# Altium PCB PCB.PcbDoc
Units mm, origin at the board's own origin, x right, y up, seen from the top; angles counter-clockwise.
Board outline 85.38 x 90.25 mm, 2 copper layers (Top Layer, Bottom Layer); 34 components, 16 nets, 78 pads, 6 vias.
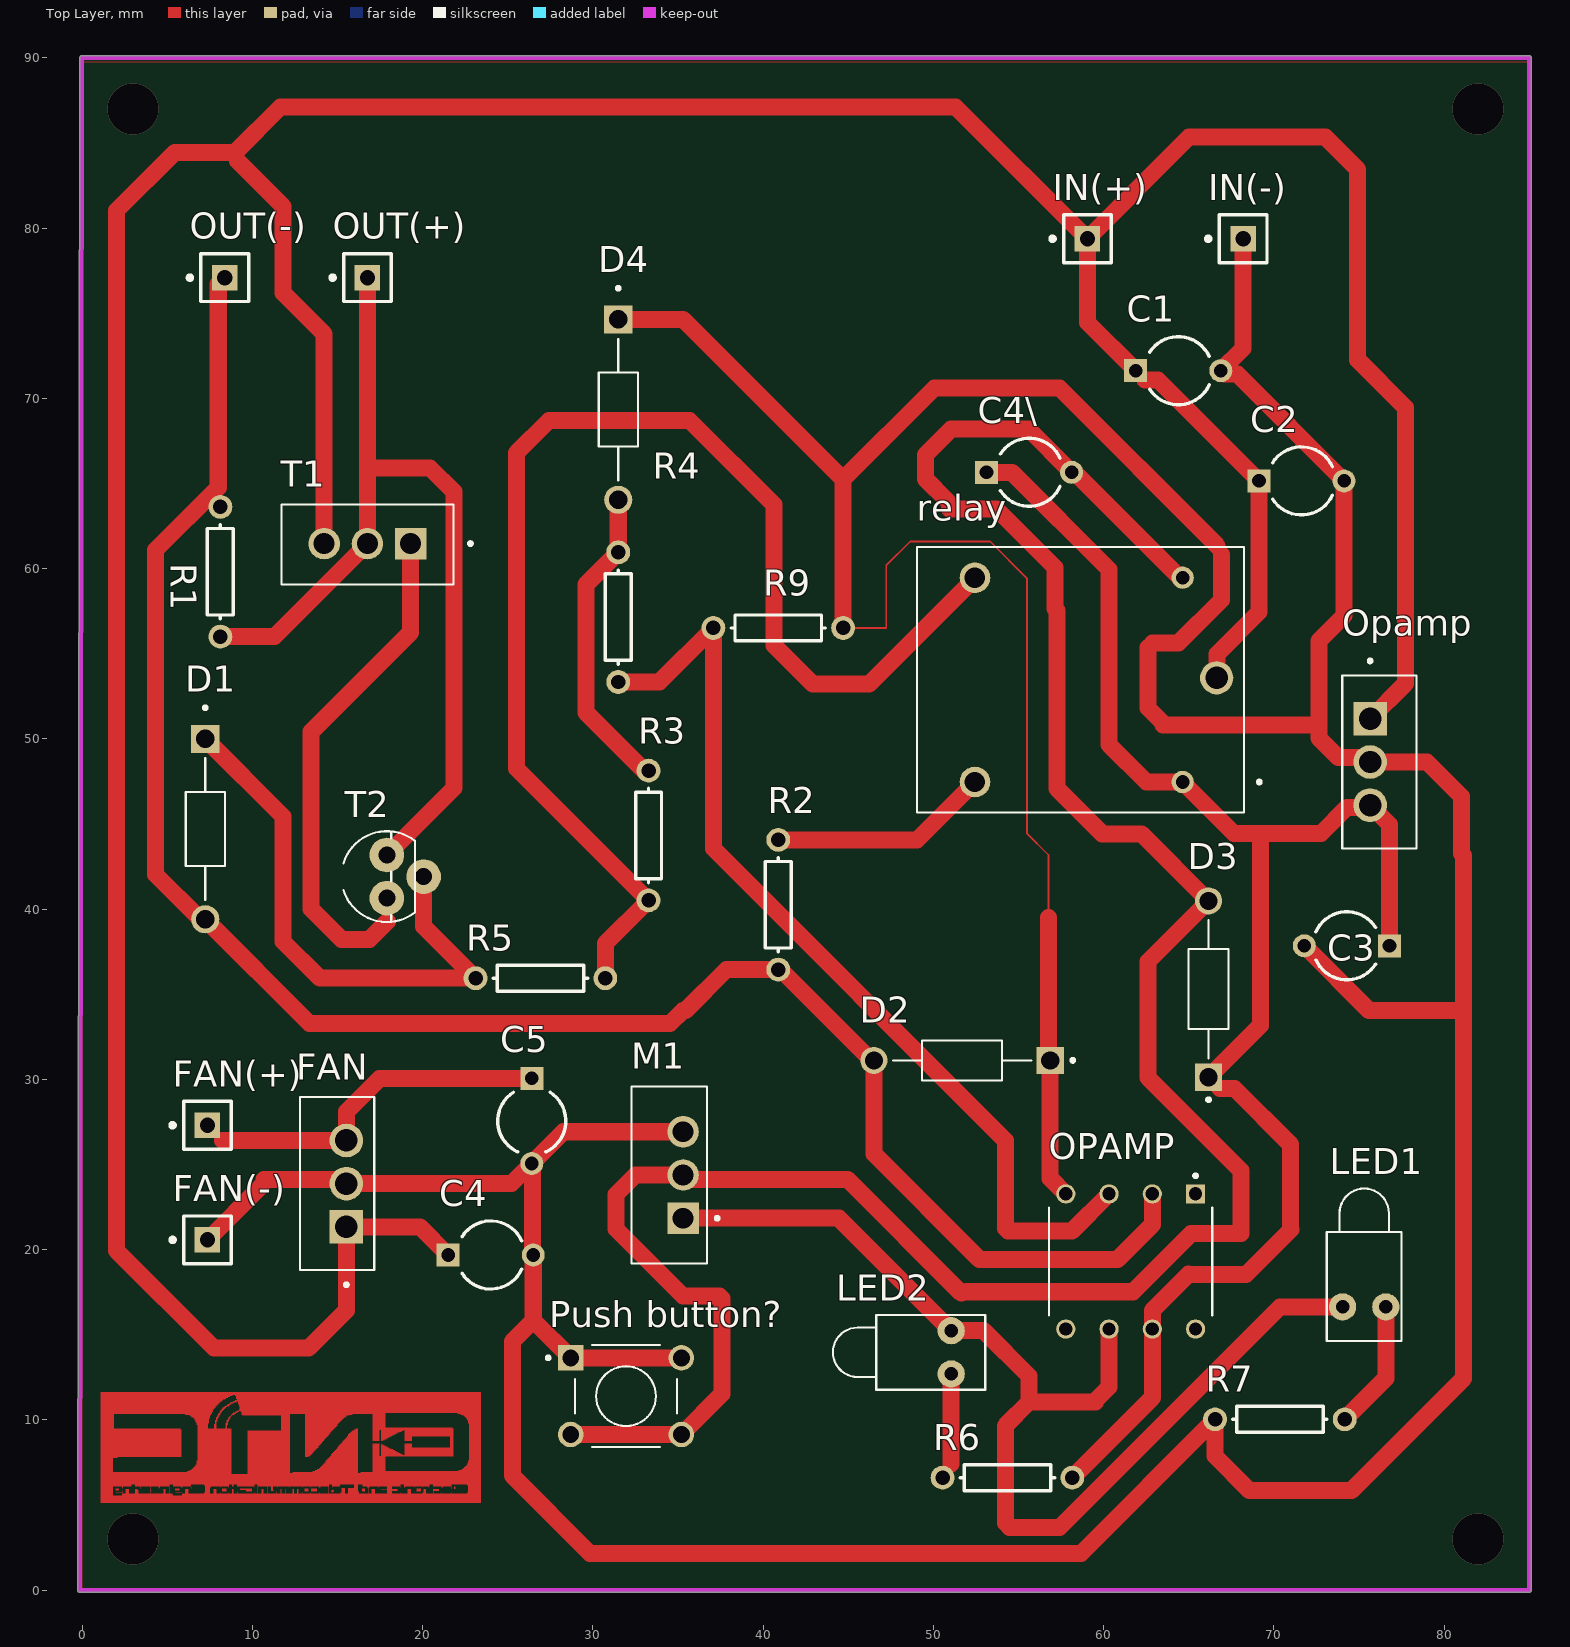
[diagram p0: Top Layer view]
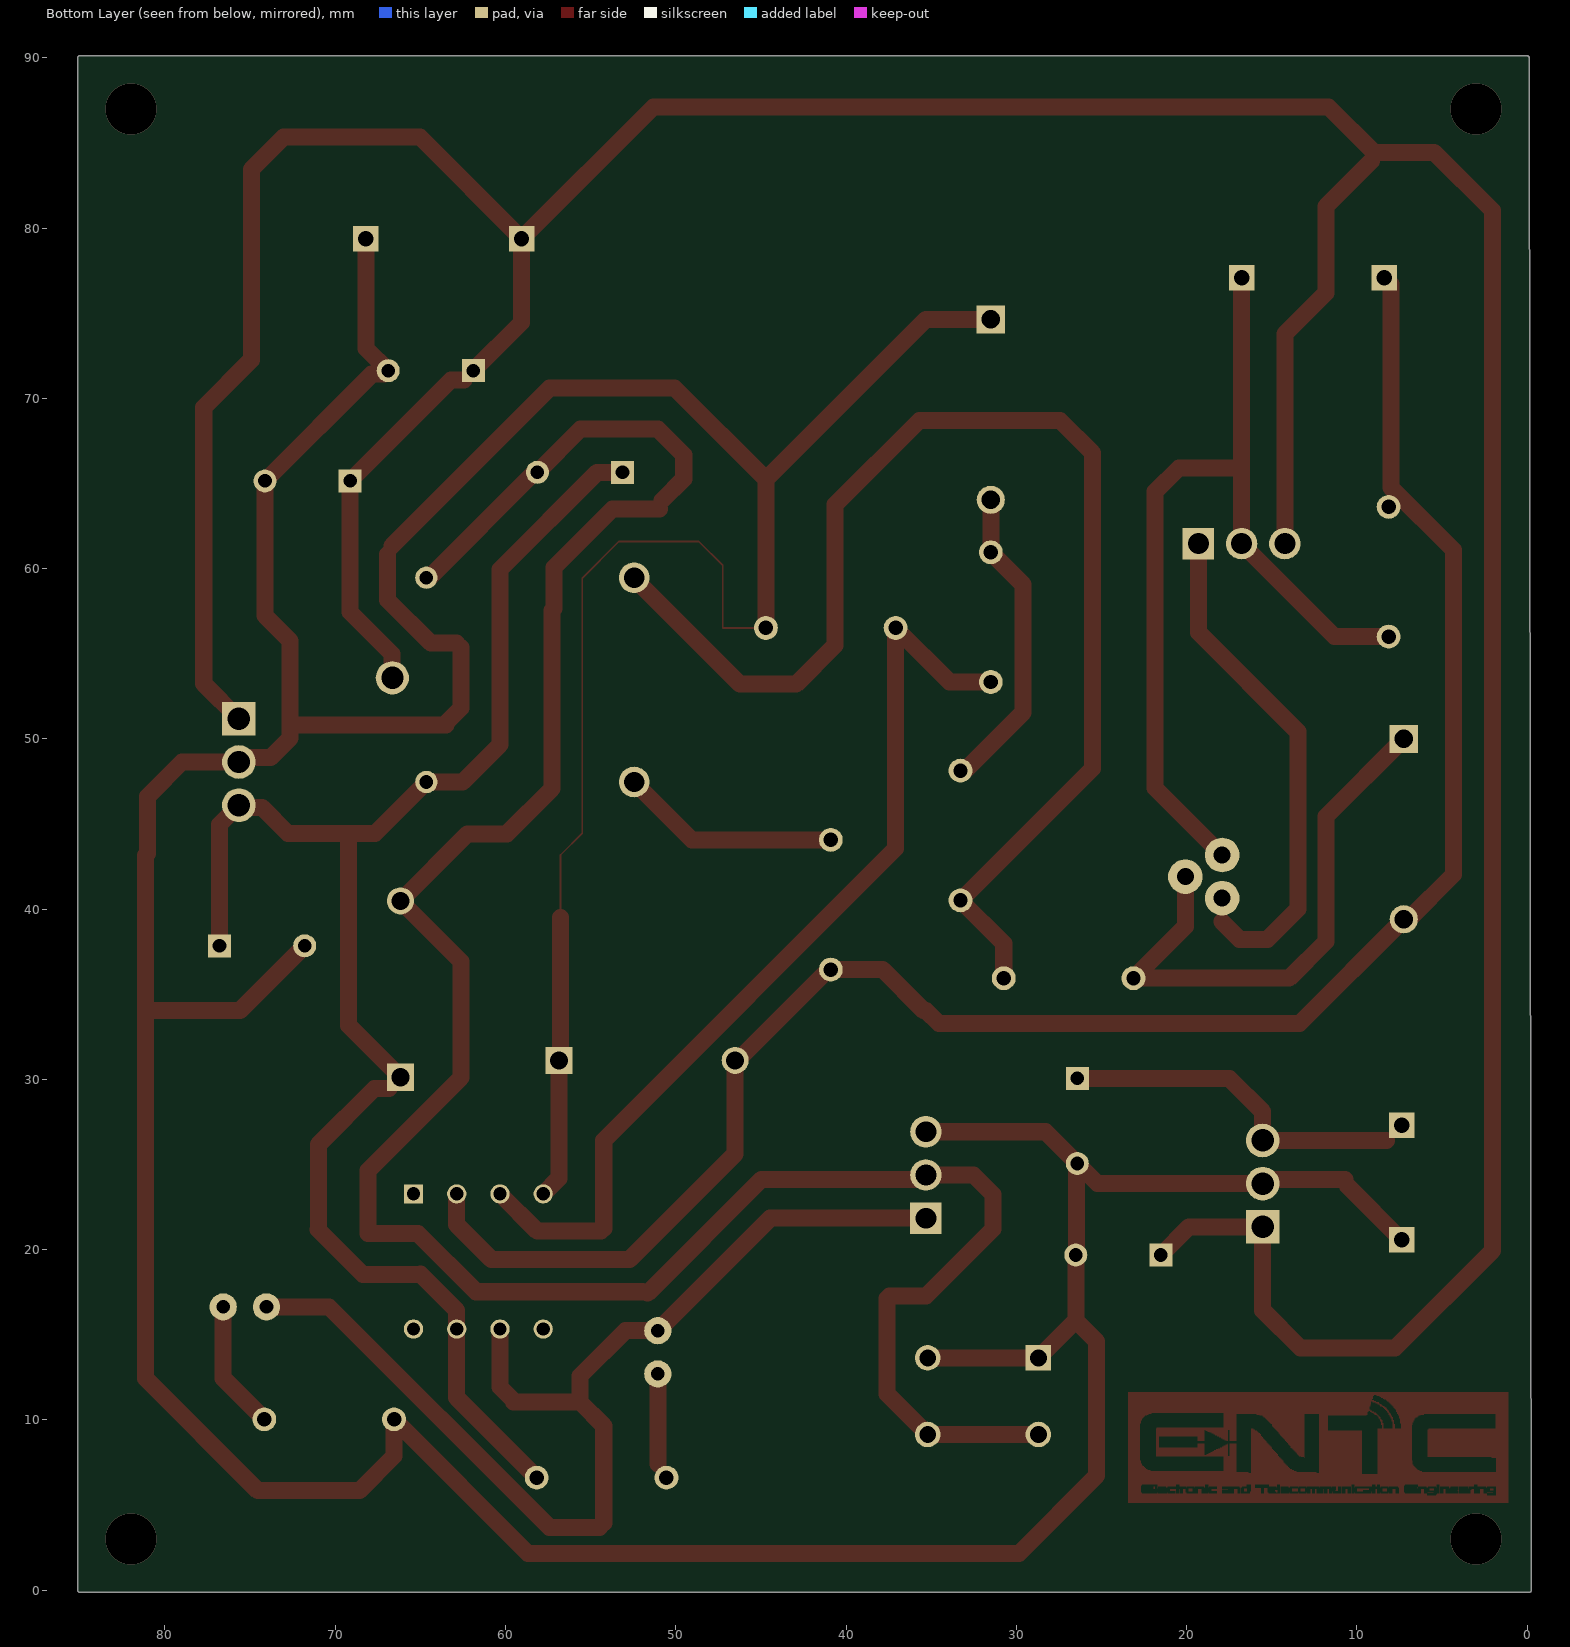
[diagram p1: Bottom Layer view, seen from below]

## Layer stack, top to bottom
Top Solder: solder mask 0.0102, Solder Resist, Dk 3.5
Top Layer: signal copper 0.0356
Dielectric 1: dielectric 0.32, FR-4, Dk 4.8
Bottom Layer: signal copper 0.0356
Bottom Solder: solder mask 0.0102, Solder Resist, Dk 3.5

## Board outline
-0.254,0 ccw(c-0.127,0) -0.064,-0.11 ccw(c0,0) 0,-0.127 85,-0.127 ccw(c85,0) 85.127,0 85.127,90 ccw(c85,90) 85,90.127 0,90.127 ccw(c0,90) -0.127,90

## Design rules (kind name [scope] priority, off if disabled: settings)
Clearance [All] p1: gap=0.254 ignorepadtopadclearanceinfootprint=FALSE except(0: Arc-Hole Track-Hole SMDPad-Hole THPad-Hole Via-Hole Fill-Hole Poly-Hole Region-Hole Text-Hole)
DiffPairsRouting [All] p1: maxlimit=0.254 minlimit=0.254 mostfreqgap=0.254 toplayer_minwidth=1 toplayer_maxwidth=2 toplayer_prefwidth=1 bottomlayer_minwidth=1 bottomlayer_maxwidth=2 bottomlayer_prefwidth=1 maxuncoupledlength=12.7
PolygonConnect [All] p1: connectstyle=Relief reliefconductorwidth=0.254 reliefentries=4 polygonreliefangle="90 Angle" airgapwidth=0.254
RoutingVias [All] p1: holewidth=0.711 width=1.27 viastyle="Through Hole" minholewidth=0.711 minwidth=1.27 maxholewidth=0.711 maxwidth=1.27
SolderMaskExpansion [All] p1: expansion=0.102 istentingtop=FALSE
Width [All] p1: maxlimit=0.254 minlimit=0.254 preferedwidth=0.254
29 further rules are at their usual default settings.

## Components (designator, comment, footprint, x,y, rotation, side; value= is the part's Value field where it differs from the comment)
C1 "Cap2" CAPR5-4X5 64.389,71.628 r0 top value=100pF
C2 "Cap2" CAPR5-4X5 71.628,65.151 r0 top value=100pF
C3 "Cap2" CAPR5-4X5 74.295,37.846 r180 top value=100pF
C4 "Cap2" CAPR5-4X5 24.003,19.685 r0 top value=100pF
C4\ "Cap2" CAPR5-4X5 55.626,65.659 r0 top value=100pF
C5 "Cap2" CAPR5-4X5 26.416,27.559 r270 top value=100pF
D1 "1N4740A" DIOAD1060W70L435D230 7.239,44.704 r270 top
D2 "1N4007G" DIOAD1036W78L470D235 51.689,31.115 r180 top
D3 "1N4007G" DIOAD1036W78L470D235 66.167,35.306 r90 top
D4 "1N4740A" DIOAD1060W70L435D230 31.496,69.342 r270 top
FAN "LM7812CT" TO253P1057X470X2040-3 14.986,23.876 r90 top
FAN(+) "Plug" PIN1 7.366,27.305 r90 top
FAN(-) "Plug" PIN1 7.366,20.574 r90 top
IN(+) "Plug" PIN1 59.055,79.375 r90 top
IN(-) "Plug" PIN1 68.199,79.375 r90 top
LED1 "LED1" LED-1 75.311,16.637 r90 top
LED2 "LED1" LED-1 51.054,13.97 r180 top
M1 "IRF3205" TO254P1041X444X2933-3 35.306,21.844 r90 top
OPAMP "LM741CN/NOPB" DIP794W45P254L959H508Q8 61.595,19.304 r270 top
Opamp "LM7812CT" TO253P1057X470X2040-3 76.2,48.641 r270 top
OUT(+) "Plug" PIN1 16.764,77.089 r90 top
OUT(-) "Plug" PIN1 8.382,77.089 r90 top
"Push button?" "ss" TE_1825910-2 28.702,13.644 r0 top
R1 "Res1" AXIAL-0.3 8.128,59.817 r270 top value=1K
R2 "Res1" AXIAL-0.3 40.894,40.259 r270 top value=1K
R3 "Res1" AXIAL-0.3 33.274,44.323 r90 top value=1K
R4 "R4" AXIAL-0.3 31.496,57.15 r270 top value=1K
R5 "Res1" AXIAL-0.3 26.924,35.941 r180 top value=1K
R6 "Res1" AXIAL-0.3 54.356,6.604 r0 top value=1K
R7 "Res1" AXIAL-0.3 70.358,10.033 r180 top value=1K
R9 "R8" AXIAL-0.3 40.894,56.515 r0 top value=1K
relay "SRD-12VDC-SL-C" RELAY_SRD-12VDC-SL-C 58.547,53.467 r180 top
T1 "MJE2955" TO254P1010X470X2933-3 19.304,61.468 r180 top
T2 "BC547" TO92 17.907,41.91 r90 top

## Footprints (in the part's own frame and the unit in brackets; to place one, negate y for a bottom-side part, rotate by r counter-clockwise, add the part's x,y. Pads: shape width x height; smd on the part's side, far side on the other; paste and mask are expansions set on the pad)
AXIAL-0.3 [mm] "Axial Device, Thru-Hole; 2 Leads; 0.3 in Pin Spacing"
  round 1.4 hole 0.85: 1(-3.81,0) 2(3.81,0)
  silkscreen extent -2.77,-0.76 2.77,0.76
CAPR5-4X5 [mm] "Capacitor; 2 Leads"
  rect 1.35x1.35 hole 0.8: 1(-2.5,0)
  round 1.35 hole 0.8: 2(2.5,0)
  silkscreen extent -1.69,-2 1.82,2
DIOAD1036W78L470D235 [mm]
  round 1.59 hole 1.06: A(5.18,0)
  rect 1.59x1.59 / inner round 1.59 / far side rect 1.59x1.59 hole 1.06: C(-5.18,0)
  silkscreen extent -6.6,-1.17 4.07,1.17, body extent -5.65,-1.4 5.65,1.4, height 2.8
DIOAD1060W70L435D230 [mm]
  round 1.65 hole 1.1: A(5.3,0)
  rect 1.65x1.65 hole 1.1: C(-5.3,0)
  silkscreen extent -7.22,-1.15 4.16,1.15, body extent -5.65,-1.4 5.65,1.4, height 2.8
DIP794W45P254L959H508Q8 [mm]
  rect 1.13x1.13 hole 0.78: 1(-3.97,3.81)
  round 1.13 hole 0.78: 2(-3.97,1.27) 3(-3.97,-1.27) 4(-3.97,-3.81) 5(3.97,-3.81) 6(3.97,-1.27) 7(3.97,1.27) 8(3.97,3.81)
  silkscreen extent -5.13,-4.79 3.18,4.79
LED-1 [mm] "LED; 2 Leads"
  round 1.6 hole 0.8: 1(0,1.27) 2(0,-1.27)
  silkscreen extent -2,-2.2 6.95,2.2
PIN1 [mm] "Connector; Plug"
  rect 1.5x1.5 hole 0.9: 1(0,0)
  silkscreen extent -1.4,-1.4 1.4,2.17
RELAY_SRD-12VDC-SL-C [mm]
  round 1.308 hole 0.8: COIL1(-6.1,6) COIL2(-6.1,-6)
  round 1.95 hole 1.3: COM(-8.1,-0.12)
  round 1.8 hole 1.2: NC(6.1,6) NO(6.1,-6)
  silkscreen extent -10.7,-7.8 9.5,7.8
TE_1825910-2 [mm]
  rect 1.498x1.498 / inner round 1.498 / far side rect 1.498x1.498 hole 0.99: 1(0,0)
  round 1.498 hole 0.99: 2(6.5,0) 3(0,-4.5) 4(6.5,-4.5)
  silkscreen extent -1.42,-5.25 6.24,0.74
TO92 [mil]
  round 80 hole 39.37: 1(50,0) 2(0,-85) 3(-50,0)
  silkscreen extent -105,-65 105,100
TO253P1057X470X2040-3 [mm]
  rect 1.98x1.98 / inner round 1.98 / far side rect 1.98x1.98 hole 1.32: 1(-2.535,-0.54)
  round 1.98 hole 1.32: 2(0,-0.54) 3(2.535,-0.54)
  silkscreen extent -6.04,-2.17 5.08,2.17, body extent -5,-1.84 5,2.66, height 18.95
TO254P1010X470X2933-3 [mm]
  rect 1.85x1.85 hole 1.23: 1(0,0)
  round 1.85 hole 1.23: 2(2.54,0) 3(5.08,0)
  silkscreen extent -3.61,-2.3 7.59,2.4
TO254P1041X444X2933-3 [mm]
  rect 1.85x1.85 hole 1.23: 1(0,0)
  round 1.85 hole 1.23: 2(2.54,0) 3(5.08,0)
  silkscreen extent -2.67,-2.1 7.75,3.03, body extent -2.67,-1.41 7.75,3.04, height 19.3

## Part data
C1 C2 C3 C4 C4\ C5: "Capacitor", PackageDescription="Capacitor; 2 Leads", PackageReference=CAPR5-4X5, Published=23-Sep-2002, Publisher="Altium Limited"
D1 D4: "DO-204AL (DO-41), 1000mW, 5%, Zener Diode", Package="DO-41 Taiwan Semiconductor", Availability="In Stock", Check_prices=https://www.snapeda.com/parts/1N4740A/Taiwan+Semiconductor/view-part/?ref=eda, MF="Taiwan Semiconductor", MP=1N4740A, Price=None, SnapEDA_Link=https://www.snapeda.com/parts/1N4740A/Taiwan+Semiconductor/view-part/?ref=snap
D2 D3: "1A, 1000V, Standard Recovery Rectifier", Package="DO-41 Taiwan Semiconductor", Availability="In Stock", Check_prices=https://www.snapeda.com/parts/1N4007G/Taiwan+Semiconductor/view-part/?ref=eda, MF="Taiwan Semiconductor", MP=1N4007G, Price=None, Purchase-URL=https://pricing.snapeda.com/search/part/1N4007G/?ref=eda, SnapEDA_Link=https://www.snapeda.com/parts/1N4007G/Taiwan+Semiconductor/view-part/?ref=snap
FAN Opamp: "Linear Voltage Regulator IC Positive Fixed 1 Output  1A TO-220-3", Package=TO-220, Availability=Unavailable, Check_prices=https://www.snapeda.com/parts/LM7812CT/Onsemi/view-part/?ref=eda, MF="ON Semiconductor", MP=LM7812CT, Price=None, SnapEDA_Link=https://www.snapeda.com/parts/LM7812CT/Onsemi/view-part/?ref=snap
LED1 LED2: "Typical RED GaAs LED", LatestRevisionDate=08-Jul-2005, LatestRevisionNote="Mech Layer 1 removed.", PackageDescription="LED; 2 Leads", PackageReference=LED-1, Published=8-Jun-2000, Publisher="Altium Limited"
M1: "N-Channel 55V 110A (Tc) 200W (Tc) Through Hole TO-220AB", Package="TO-220 Infineon", Availability="In Stock", Check_prices=https://www.snapeda.com/parts/IRF3205/Infineon+Technologies/view-part/?ref=eda, MF="Infineon Technologies", MP=IRF3205, Price=None, Purchase-URL=https://pricing.snapeda.com/search/part/IRF3205/?ref=eda, SnapEDA_Link=https://www.snapeda.com/parts/IRF3205/Infineon+Technologies/view-part/?ref=snap
OPAMP: "Single 44V 1MHz operational amplifier 8-PDIP 0 to 70", Package="PDIP-8 Texas Instruments", Availability=Unavailable, DigiKey-Purchase-URL=https://snapeda.com/shop?store=DigiKey&id=74633, MF="Texas Instruments", Mouser-Purchase-URL=https://snapeda.com/shop?store=Mouser&id=74633, MP=LM741CN/NOPB, Price=None, SnapEDA_Link=https://www.snapeda.com/parts/LM741CN/NOPB/Texas%20Instruments/view-part/74633/?ref=snap, Texas_Instruments-Purchase-URL=https://snapeda.com/shop?store=Texas+Instruments&id=74633
"Push button?": library part 1825910-2, "50 mA SPST Round Actuator 160 Gram Force Tactile Pushbutton Switch", Package=None, Availability="In Stock", Check_prices=https://www.snapeda.com/parts/1825910-2/TE+Connectivity+ALCOSWITCH+Switches/view-part/?ref=eda, EU_RoHS_Compliance=Compliant, MF="TE Connectivity", MP=1825910-2, Price=None, Purchase-URL=https://pricing.snapeda.com/search/part/1825910-2/?ref=eda, SnapEDA_Link=https://www.snapeda.com/parts/1825910-2/TE+Connectivity+ALCOSWITCH+Switches/view-part/?ref=snap
R1 R2 R3 R5 R6 R7: "Resistor", LatestRevisionDate=17-Jul-2002, LatestRevisionNote="Re-released for DXP Platform.", PackageDescription="Axial Device, Thru-Hole; 2 Leads; 0.3 in Pin Spacing", PackageReference=AXIAL-0.3, Published=8-Jun-2000, Publisher="Altium Limited"
R4 R9: library part Res1, "Resistor", LatestRevisionDate=17-Jul-2002, LatestRevisionNote="Re-released for DXP Platform.", PackageDescription="Axial Device, Thru-Hole; 2 Leads; 0.3 in Pin Spacing", PackageReference=AXIAL-0.3, Published=8-Jun-2000, Publisher="Altium Limited"
relay: "General Purpose Non Latching 12VDC SPDT Through Hole Relays RoHS", Package=None, Availability=Unavailable, MP=SRD-12VDC-SL-C, Price=None
T1: "TRANS PNP 60V 10A TO220AB", Package="TO-220 ON Semiconductor", Availability=Unavailable, MF="ON Semiconductor", MP=MJE2955, Price=None, SnapEDA_Link=https://www.snapeda.com/parts/MJE2955/ON%20Semiconductor/view-part/581579/?ref=snap
T2: "Trans GP BJT NPN 45V 0.1A 500mW 3-Pin TO-92 T/R", Package=None, Availability="In Stock", Check_prices=https://www.snapeda.com/parts/BC547/Onsemi/view-part/?ref=eda, MF="ON Semiconductor", MP=BC547, Price=None, Purchase-URL=https://pricing.snapeda.com/search/part/BC547/?ref=eda, SnapEDA_Link=https://www.snapeda.com/parts/BC547/Onsemi/view-part/?ref=snap
FAN(+) FAN(-) IN(+) IN(-) OUT(+) OUT(-): LatestRevisionDate=17-Jul-2002, LatestRevisionNote="Re-released for DXP Platform.", Publisher="Altium Limited"

## Via types
v1: diameter 3, hole 3, Top Layer to Bottom Layer, 4 vias
v2: diameter 1.27, hole 0.711, Top Layer to Bottom Layer, 2 vias

## Nets (pads, with @x,y where several pads share a name; then routed paths per layer and width w, separated by ;. In a path a pad name is that pad's centre, name@x,y a point inside that pad or via, vN(x,y) a via of type N, cw(c..) or ccw(c..) an arc to the next point about the centre after c; other vN are vias at no path point)
GND: "Push button?.1" "Push button?.2" C1.2 C2.2 C3.2 C4.2 C5.2 D2.C D4.C FAN(-).1 FAN.2 IN(-).1 M1.3 Opamp.2 OPAMP.4 R7.2 R9.2 | length 345.4
  Top Layer w0.1: R9.2 47.244,56.515 47.244,60.198 48.641,61.595 53.34,61.595 55.499,59.436 55.499,44.45 56.769,43.18 56.769,39.497
  Top Layer w0.254: 10.541,23.749 10.541,23.981 10.69,24.13 ; FAN.2@15.272,24.13 FAN.2 ; C5.2 C5.2@26.459,25.015 ; C4.2@26.459,19.728 C4.2 ; D2.C@56.769,31.215 D2.C ; OPAMP.4@57.537,23.759 57.785,23.511 OPAMP.4 ; 62.611,55.372 62.865,55.626 ; 63.5,50.822 63.5,50.927 ; 66.675,61.341 66.675,61.087 66.929,60.833 ; C1.2 C1.2@67.099,71.418 ; 72.539,50.822 72.644,50.927 ; Opamp.2@75.406,48.895 Opamp.2 ; 80.899,46.736 81.026,46.609 ; 81.026,43.275 81.153,43.148
  Top Layer w1: 7.366,20.574 10.541,23.749 ; 10.69,24.13 FAN.2@15.272,24.13 ; FAN.2 25.233,23.876 C5.2 28.281,26.924 M1.3 ; C4.2@26.459,19.728 C5.2@26.459,25.015 ; C4.2 26.503,15.843 ; D4.C 35.306,74.642 44.704,65.244 ; 35.202,13.644 28.702,13.644 26.503,15.843 ; R9.2 44.704,65.244 ; D2.C@56.769,31.215 56.769,39.497 ; D2.C 56.869,24.19 OPAMP.4 ; 62.611,55.372 62.611,51.816 63.5,50.927 ; 62.865,55.626 64.389,55.626 66.929,58.166 66.929,60.833 ; 63.5,50.822 72.539,50.822 ; 66.675,61.341 57.404,70.612 50.072,70.612 44.704,65.244 ; C1.2 68.199,72.938 68.199,79.375 ; C1.2@67.099,71.418 67.861,71.418 C2.2 74.128,57.237 72.644,55.753 72.644,50.927 72.644,50.06 73.809,48.895 Opamp.2@75.406,48.895 ; C3.2 75.605,34.036 81.153,34.036 ; Opamp.2 78.994,48.641 80.899,46.736 ; 81.026,43.275 81.026,46.609 ; 81.153,43.148 81.153,34.036 ; 26.503,15.843 25.273,14.613 25.273,6.731 29.845,2.159 58.674,2.159 R7.2 66.548,7.874 68.58,5.842 74.549,5.842 81.153,12.446 81.153,34.036
Input: C1.1 C2.1 C4.1 FAN.1 IN(+).1 Opamp.1 relay.COM T1.3 | length 262.2
  Top Layer w0.254: 8.995,84.455 9.144,84.306 9.144,83.947 ; C1.1 C1.1@62.437,71.08 ; relay.COM relay.COM@66.675,53.615
  Top Layer w1: 9.144,83.947 11.811,81.28 11.811,76.2 14.224,73.787 T1.3 ; C4.1 19.847,21.341 FAN.1 15.526,16.437 13.313,14.224 7.747,14.224 2.032,19.939 2.032,81.026 5.461,84.455 8.995,84.455 11.662,87.122 51.308,87.122 59.055,79.375 ; C1.1 59.055,74.462 59.055,79.375 ; C1.1@62.437,71.08 63.199,71.08 C2.1 69.128,57.444 66.675,54.991 relay.COM@66.675,53.615 ; Opamp.1 77.724,53.24 77.724,69.469 74.93,72.263 74.93,83.439 73.025,85.344 65.024,85.344 59.055,79.375
NetC3_1: C3.1 C4\.1 D3.C Opamp.3 OPAMP.7 R6.2 relay.COIL1 | length 95.8
  Top Layer w0.254: 65.002,18.564 65.024,18.542 ; D3.C D3.C@66.835,29.458 ; 69.088,44.45 69.215,44.323 ; 70.993,21.209 71.015,21.187 ; Opamp.3@75.522,45.968 Opamp.3
  Top Layer w1: C4\.1 54.61,65.659 60.325,59.944 60.325,49.657 62.515,47.467 relay.COIL1 67.664,44.45 69.088,44.45 72.771,44.45 74.289,45.968 Opamp.3@75.522,45.968 ; R6.2 62.865,11.303 OPAMP.7 62.865,16.427 65.002,18.564 ; 65.024,18.542 68.37,18.542 71.015,21.187 ; D3.C 69.215,33.174 69.215,40.005 69.215,44.323 ; D3.C@66.835,29.458 67.697,29.458 70.993,26.162 70.993,21.209 ; Opamp.3 76.795,44.971 C3.1
NetC4\_2: "Push button?.3" "Push button?.4" C4\.2 D3.A M1.2 relay.COIL2 | length 145.6
  Top Layer w0.254: M1.2 M1.2@35.56,24.13 ; 37.443,17.272 37.592,17.123 ; 50.8,64.008 50.8,63.649 50.949,63.5 ; 51.647,17.441 51.858,17.441 51.943,17.526 ; 57.15,57.658 57.277,57.531 ; C4\.2 C4\.2@58.291,65.659 ; relay.COIL2@64.482,59.467 relay.COIL2
  Top Layer w1: 28.702,9.144 35.202,9.144 37.592,11.534 37.592,17.123 ; M1.2 32.512,24.384 31.369,23.241 31.369,21.209 35.306,17.272 37.443,17.272 ; M1.2@35.56,24.13 44.958,24.13 51.647,17.441 ; 50.8,64.008 49.53,65.278 49.53,66.675 51.054,68.199 55.586,68.199 C4\.2 ; 50.949,63.5 53.721,63.5 57.15,60.071 57.15,57.658 ; 51.943,17.526 61.722,17.526 65.151,20.955 68.072,20.955 68.072,24.638 62.611,30.099 62.611,36.93 D3.A 62.227,44.426 59.924,44.426 57.277,47.073 57.277,57.531 ; C4\.2@58.291,65.659 relay.COIL2@64.482,59.467
NetC5_1: C5.1 FAN(+).1 FAN.3 | length 21.9
  Top Layer w0.254: 7.366,27.305 8.26,26.411
  Top Layer w1: 8.26,26.411 FAN.3 15.526,28.099 17.486,30.059 C5.1
NetD1_C: D1.C R5.2 T2.2 | length 33.2
  Top Layer w1: D1.C 11.811,45.432 11.811,38.1 13.97,35.941 R5.2 20.066,38.989 T2.2
NetD4_A: D4.A R3.2 R4.1 | length 18.4
  Top Layer w0.254: R3.2@33.02,48.133 R3.2
  Top Layer w1: D4.A R4.1 29.591,59.055 29.591,51.562 R3.2@33.02,48.133
NetLED1_1: LED1.1 LED2.2 M1.1 OPAMP.6 | length 67.2
  Top Layer w0.254: 54.229,3.937 54.483,3.683 ; 59.541,11.049 59.563,11.071 59.563,11.176
  Top Layer w1: M1.1 44.45,21.844 LED2.2 52.959,15.24 55.626,12.573 55.626,11.049 ; 54.229,3.937 54.229,9.652 55.626,11.049 ; 54.483,3.683 57.404,3.683 70.358,16.637 LED1.1 ; 59.541,11.049 55.626,11.049 ; 59.563,11.176 60.325,11.938 OPAMP.6
NetLED1_2: LED1.2 R7.1 | length 7.6
  Top Layer w1: R7.1 76.581,12.446 LED1.2
NetLED2_1: LED2.1 R6.1 | length 6.3
  Top Layer w0.254: R6.1 50.546,6.914 51.054,7.422
  Top Layer w1: 51.054,7.422 LED2.1
NetOPAMP_3: OPAMP.3 R4.2 R9.1 | length 56.5
  Top Layer w0.254: 54.229,21.231 54.378,21.082 ; OPAMP.3@60.198,23.401 OPAMP.3
  Top Layer w1: R4.2 33.909,53.34 R9.1 37.084,43.561 54.229,26.416 54.229,21.231 ; 54.378,21.082 58.133,21.082 OPAMP.3
NetR2_1: R2.1 relay.NC | length 13
  Top Layer w1: R2.1 49.049,44.069 relay.NC
NetR3_1: R3.1 R5.1 relay.NO | length 76.8
  Top Layer w0.254: relay.NO@52.338,59.467 relay.NO relay.NO@52.447,59.432
  Top Layer w1: R5.1 30.734,37.973 R3.1 25.527,48.26 25.527,66.802 27.432,68.707 35.687,68.707 40.64,63.754 40.64,55.499 42.926,53.213 46.228,53.213 relay.NO@52.447,59.432
NetT1_1: T1.1 T2.3 | length 30.9
  Top Layer w0.254: T2.3 17.929,40.618 17.929,39.265
  Top Layer w1: 17.929,39.265 16.891,38.227 15.24,38.227 13.462,40.005 13.462,50.419 19.304,56.261 T1.1
"Output (+)": OUT(+).1 R1.2 T1.2 T2.1 | length 55.2
  Top Layer w0.254: T1.2 T1.2@16.764,61.9 ; 16.764,65.786 16.891,65.913
  Top Layer w1: R1.2 11.303,56.007 T1.2 ; T1.2@16.764,61.9 16.764,65.786 16.764,77.089 ; 16.891,65.913 20.447,65.913 21.844,64.516 21.844,47.117 T2.1
"Output (-)": D1.A D2.A OPAMP.2 OUT(-).1 R1.1 R2.2 | length 113.1
  Top Layer w0.254: D1.A@6.951,39.404 D1.A ; 8.001,76.708 8.382,77.089 ; 35.306,34.036 35.433,34.036 ; R2.2 R2.2@41.034,36.449 ; D2.A@46.368,31.115 D2.A
  Top Layer w1: D1.A@6.951,39.404 4.318,42.037 4.318,61.087 8.001,64.77 8.001,76.708 ; D1.A 13.369,33.274 34.544,33.274 35.306,34.036 ; 35.433,34.036 37.846,36.449 R2.2 ; R2.2@41.034,36.449 D2.A@46.368,31.115 ; D2.A 46.509,25.627 52.705,19.431 60.833,19.431 62.865,21.463 OPAMP.2
pads on no net: OPAMP.1 OPAMP.5 OPAMP.8
copper on no net:
  other v1: 3,3 82,3 3,87 82,87
  other v2: 3.81,2.667 3.81,2.667

## Polygon pours and split planes (outlines as drawn)
no net on Top Layer "NONET_L01_P000" (solid, remove dead copper, pour order 0): 0,0.127 0,89.771 85,89.771 85,0 -0.127,0

## Keep-outs
Top Layer:
  lines w0.254: -0.127,0 0,90 85,90 85,0 0,0

## Other copper
Top Layer:
  region: 237 vertices and 17 holes, not listed, extent 1.104,5.133 23.427,11.614
  region: 21.931,6.019 21.931,5.964 21.876,5.964 21.876,6.019 21.876,6.075 21.931,6.075
  region: 5.702,5.908 5.702,5.853 5.48,5.853 5.48,5.908 5.48,5.964 5.702,5.964
  region: 2.157,5.908 2.157,5.853 1.991,5.853 1.991,5.908 1.991,5.964 2.157,5.964
  region: 19.882,5.908 19.882,5.853 19.882,5.798 19.66,5.798 19.66,5.853 19.66,5.908 19.66,5.964 19.882,5.964
  region: 16.614,5.908 16.614,5.853 16.614,5.798 16.448,5.798 16.448,5.853 16.448,5.908 16.448,5.964 16.614,5.964
  region: 13.789,5.908 13.789,5.853 13.789,5.798 13.456,5.798 13.456,5.853 13.456,5.908 13.456,5.964 13.789,5.964
  region: 13.29,5.908 13.29,5.853 13.29,5.798 13.069,5.798 13.069,5.853 13.069,5.908 13.069,5.964 13.29,5.964
  region: 9.967,5.908 9.967,5.853 9.967,5.798 9.635,5.798 9.635,5.853 9.635,5.908 9.302,5.908 9.302,5.964 9.967,5.964
  region: 8.471,5.908 8.471,5.853 8.471,5.798 8.25,5.798 8.25,5.853 8.25,5.908 8.25,5.964 8.471,5.964
  region: 14.786,5.798 14.73,5.798 14.73,5.742 14.675,5.742 14.675,5.798 14.675,5.853 14.786,5.853

## Text inside footprints (layer, text, board x,y; h text height)
T2: Mechanical 13 "2" at 17.272,41.275 h1.27 r90; Mechanical 13 "3" at 17.907,39.751 h1.27 r90; Mechanical 13 "1" at 17.907,43.053 h1.27 r90